# Altium PCB PCB1.PcbDoc
Units mm, origin at the board's own origin, x right, y up, seen from the top; angles counter-clockwise.
Board outline 116.59 x 62.99 mm, 2 copper layers (Top Layer, Bottom Layer); 34 components, 18 nets, 83 pads, 0 vias.
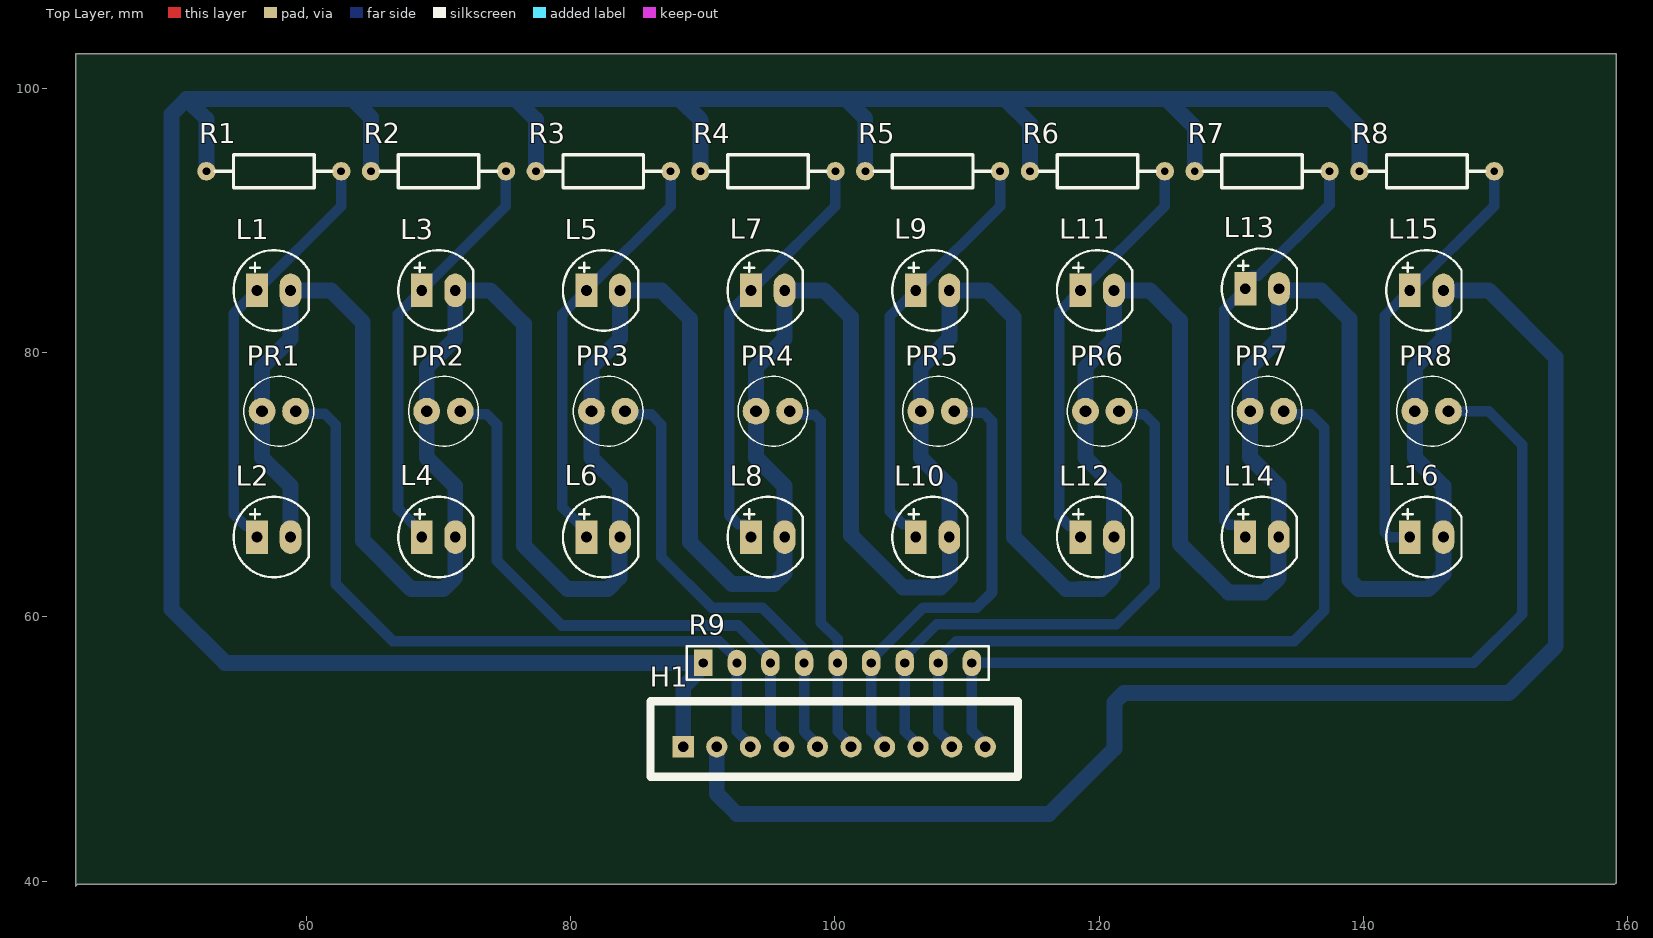
[diagram p0: Top Layer view]
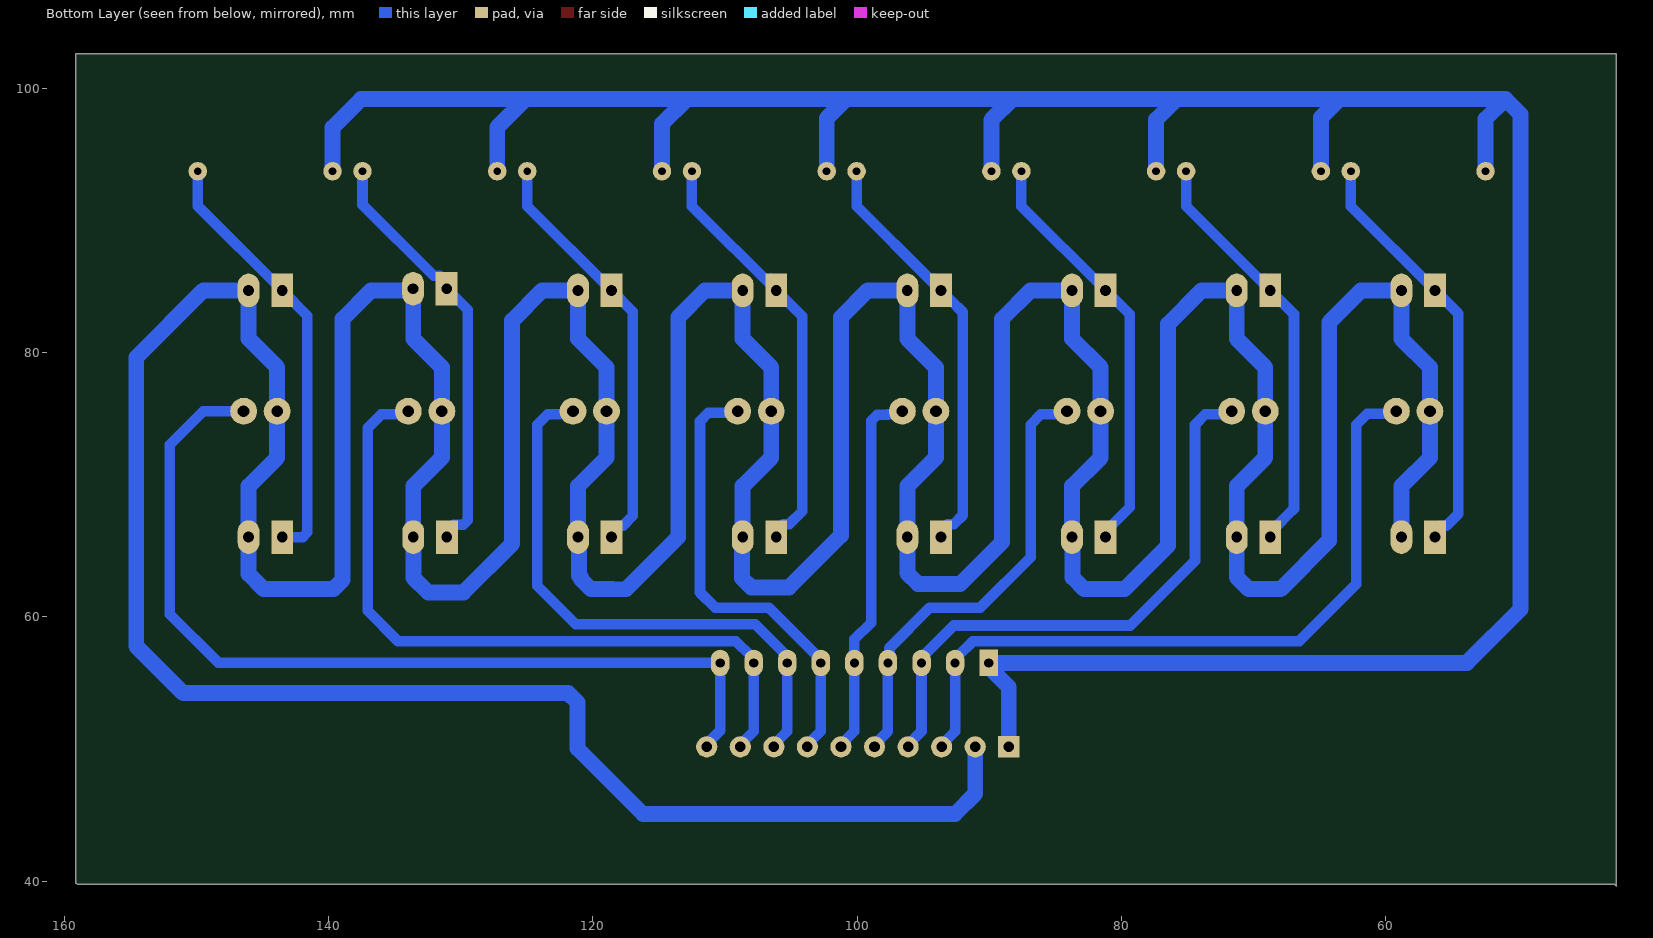
[diagram p1: Bottom Layer view, seen from below]
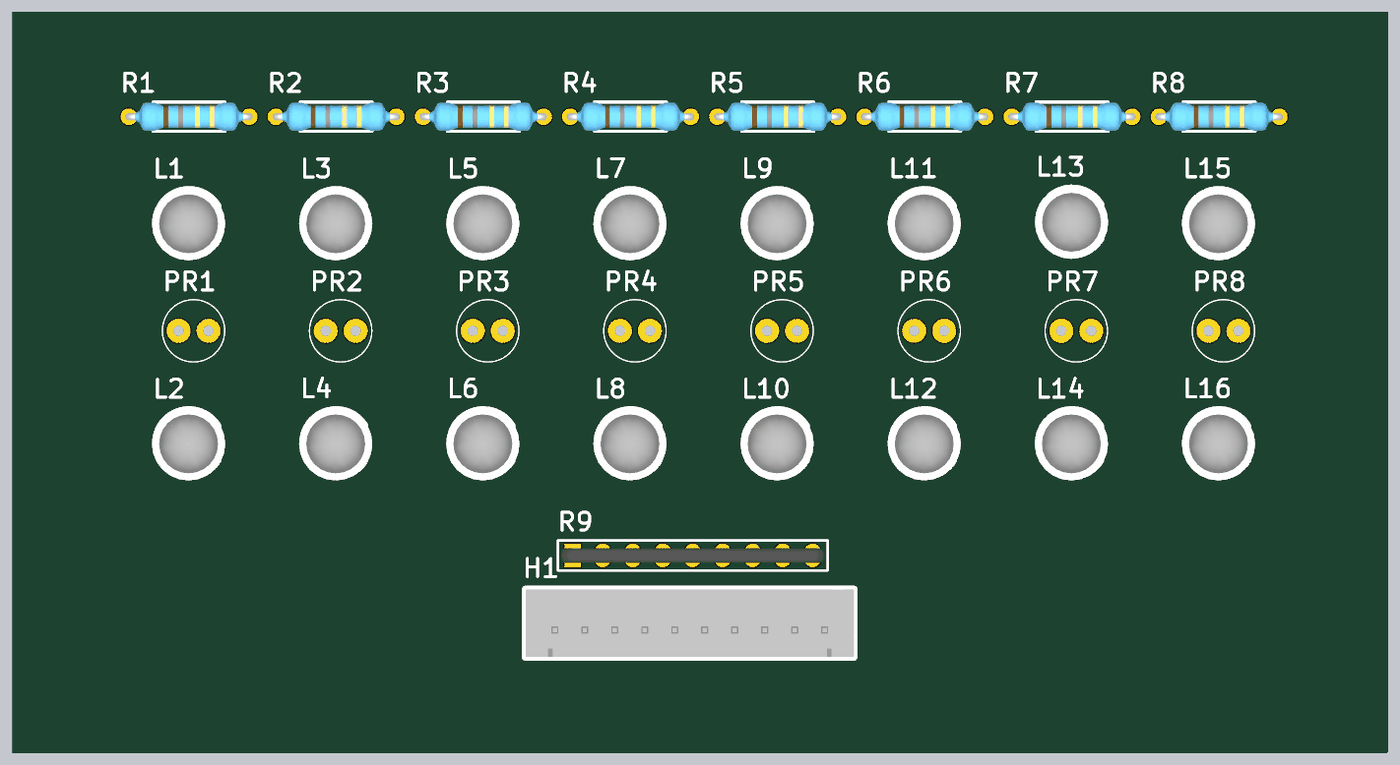
[diagram p2: 3D render of the assembled board from above, using the file's embedded part models]

## Layer stack, top to bottom
Top Solder: solder mask 0.0102, Solder Resist, Dk 3.5
Top Layer: signal copper 0.0356
Dielectric 1: dielectric 0.32, FR-4, Dk 4.8
Bottom Layer: signal copper 0.0356
Bottom Solder: solder mask 0.0102, Solder Resist, Dk 3.5

## Board outline
42.545,39.624 42.672,39.751 159.004,39.751 159.131,39.878 159.131,102.616 42.545,102.616

## Design rules (kind name [scope] priority, off if disabled: settings)
Clearance [All] p1: gap=0.254 ignorepadtopadclearanceinfootprint=FALSE except(0: Arc-Hole Track-Hole SMDPad-Hole THPad-Hole Via-Hole Fill-Hole Poly-Hole Region-Hole Text-Hole)
PolygonConnect [All] p1: connectstyle=Relief reliefconductorwidth=0.254 reliefentries=4 polygonreliefangle="90 Angle" airgapwidth=0.254
RoutingCorners [All] p1: cornerstyle=Round minsetback=2.54 maxsetback=2.54
RoutingVias [All] p1: holewidth=0.711 width=1.27 viastyle="Through Hole" minholewidth=0.711 minwidth=1.27 maxholewidth=0.711 maxwidth=1.27
SolderMaskExpansion [All] p1: expansion=0.102 istentingtop=FALSE
Width gnd [InNet('GND')] p1: maxlimit=1.2 minlimit=0.8 preferedwidth=1
Width 5V [InNet('+5')] p2: maxlimit=1.2 minlimit=0.8 preferedwidth=1
Width width1 [All] p3: maxlimit=0.8 minlimit=0.4 preferedwidth=0.8
29 further rules are at their usual default settings.

## Components (designator, comment, footprint, x,y, rotation, side; value= is the part's Value field where it differs from the comment)
H1 "Header 10P 2.54 Duc Thang" XH2.54M-10 88.519,50.165 r0 top
L1 "LED" LED-5MM-WHITE 57.531,84.709 r0 top
L2 "LED" LED-5MM-WHITE 57.531,66.04 r0 top
L3 "LED" LED-5MM-WHITE 69.996,84.709 r0 top
L4 "LED" LED-5MM-WHITE 69.996,66.04 r0 top
L5 "LED" LED-5MM-WHITE 82.46,84.709 r0 top
L6 "LED" LED-5MM-WHITE 82.46,66.04 r0 top
L7 "LED" LED-5MM-WHITE 94.925,84.709 r0 top
L8 "LED" LED-5MM-WHITE 94.925,66.04 r0 top
L9 "LED" LED-5MM-WHITE 107.389,84.709 r0 top
L10 "LED" LED-5MM-WHITE 107.389,66.04 r0 top
L11 "LED" LED-5MM-WHITE 119.854,84.709 r0 top
L12 "LED" LED-5MM-WHITE 119.854,66.04 r0 top
L13 "LED" LED-5MM-WHITE 132.334,84.836 r0 top
L14 "LED" LED-5MM-WHITE 132.318,66.04 r0 top
L15 "LED" LED-5MM-WHITE 144.783,84.709 r0 top
L16 "LED" LED-5MM-WHITE 144.783,66.04 r0 top
PR1 "Quang Tro" "Quang Tro" 57.912,75.565 r0 top
PR2 "Quang Tro" "Quang Tro" 70.374,75.565 r0 top
PR3 "Quang Tro" "Quang Tro" 82.838,75.565 r0 top
PR4 "Quang Tro" "Quang Tro" 95.303,75.565 r0 top
PR5 "Quang Tro" "Quang Tro" 107.767,75.565 r0 top
PR6 "Quang Tro" "Quang Tro" 120.232,75.565 r0 top
PR7 "Quang Tro" "Quang Tro" 132.696,75.565 r0 top
PR8 "Quang Tro" "Quang Tro" 145.161,75.565 r0 top
R1 "220R" "tro vach 1/4w" 57.531,93.726 r180 top
R2 "220R" "tro vach 1/4w" 69.998,93.726 r180 top
R3 "220R" "tro vach 1/4w" 82.465,93.726 r180 top
R4 "220R" "tro vach 1/4w" 94.932,93.726 r180 top
R5 "220R" "tro vach 1/4w" 107.399,93.726 r180 top
R6 "220R" "tro vach 1/4w" 119.866,93.726 r180 top
R7 "220R" "tro vach 1/4w" 132.333,93.726 r180 top
R8 "220R" "tro vach 1/4w" 144.8,93.726 r180 top
R9 "10k" "tro bang a9" 100.203,56.642 r0 top

## Footprints (in the part's own frame and the unit in brackets; to place one, negate y for a bottom-side part, rotate by r counter-clockwise, add the part's x,y. Pads: shape width x height; smd on the part's side, far side on the other; paste and mask are expansions set on the pad)
LED-5MM-WHITE [mil] "LED 2 PIN, 5 ly , Only colour, pin to pin 110mil"
  rect 65x100 hole 32: 1(-50,0)
  oval 65x100 hole 32: 2(50,0)
  silkscreen extent -120,-120 104,120, body extent -124,-125 121,120, height 340
"Quang Tro" [mil]
  round 80 hole 35: 1(-50,0) 2(50,0)
  silkscreen extent -104,-104 104,104
"tro bang a9" [mm]
  rect 1.4x2 hole 0.7: 1(-10.16,-0.127)
  oval 1.4x2 hole 0.7: 2(-7.62,-0.127) 3(-5.08,-0.127) 4(-2.54,-0.127) 5(0,-0.127) 6(2.54,-0.127) 7(5.08,-0.127) 8(7.62,-0.127) 9(10.16,-0.127)
  silkscreen extent -11.43,-1.4 11.43,1.14, body extent -11.25,-0.76 11.25,0.49, height 5.57
"tro vach 1/4w" [mm]
  round 1.4 hole 0.6: 1(-5.1,0) 2(5.1,0)
  silkscreen extent -4.39,-1.25 4.42,1.25, body extent -5.38,-1.2 5.38,1.2, height 2.41
XH2.54M-10 [mm]
  rect 1.6x1.6 hole 0.8: 1(0,0)
  round 1.6 hole 0.8: 2(2.54,0) 3(5.08,0) 4(7.62,0) 5(10.16,0) 6(12.7,0) 7(15.24,0) 8(17.78,0) 9(20.32,0) 10(22.86,0)
  silkscreen extent -2.48,-2.26 25.34,3.46, body extent -2.48,-2.26 25.34,3.48, height 6.91

## Part data
H1: "Cắm", Chung_Loai=Cắm, Don_Vi=Con, Ma_Hang=MH001286, Ten_Linh_Kien="Header 10P XH2.54-10P Đực Thẳng"
L1 L2 L3 L4 L5 L6 L7 L8 L9 L10 L11 L12 L13 L14 L15 L16: library part "LED 5mm Trang", "Cắm", Chung_Loai=Cắm, Don_Vi=Con, Ma_Hang=MH008983, Ten_Linh_Kien="Led 5MM Trắng Đục (1000c)"
PR1 PR2 PR3 PR4 PR5 PR6 PR7 PR8: "Photoresistor", Creator="Bien Nguyen"
R1 R2 R3 R4 R5 R6 R7 R8: library part "Tro Vach 1/4W 5% 220R", "Cắm", Chung_Loai=Cắm, Don_Vi=Con, Ma_Hang=MH007300, So_Chan=2, Ten_Linh_Kien="Trở Vạch 1/4w 5% 220R"
R9: library part "Tro Bang A9 100k", "Cắm", Chung_Loai=Cắm, Don_Vi=Con, Ma_Hang=MH001443, So_Chan=9, Ten_Linh_Kien="Trở Băng A09-104 100k 1/8w 5%"

## Nets (pads, with @x,y where several pads share a name; then routed paths per layer and width w, separated by ;. In a path a pad name is that pad's centre, name@x,y a point inside that pad or via, vN(x,y) a via of type N, cw(c..) or ccw(c..) an arc to the next point about the centre after c; other vN are vias at no path point)
+5: H1.1 R1.2 R2.2 R3.2 R4.2 R5.2 R6.2 R7.2 R8.2 R9.1 | length 224
  Bottom Layer w1.2: R1.2 52.431,97.683 50.927,99.187 ; R2.2 64.898,97.789 63.5,99.187 ; R3.2 77.365,97.641 75.819,99.187 ; H1.1 88.519,54.691 90.043,56.215 R9.1 53.848,56.515 49.784,60.579 49.784,98.044 50.927,99.187 ; R4.2 89.832,97.62 88.265,99.187 ; R5.2 102.299,97.726 100.838,99.187 ; R6.2 114.766,97.324 112.903,99.187 ; R7.2 127.233,97.049 125.095,99.187 ; R8.2 139.7,97.028 137.541,99.187 125.095,99.187 ; 50.927,99.187 63.5,99.187 ; 63.5,99.187 75.819,99.187 ; 75.819,99.187 88.265,99.187 ; 88.265,99.187 100.838,99.187 ; 100.838,99.187 112.903,99.187 ; 112.903,99.187 125.095,99.187
GND: H1.2 L1.2 L2.2 L3.2 L4.2 L5.2 L6.2 L7.2 L8.2 L9.2 L10.2 L11.2 L12.2 L13.2 L14.2 L15.2 L16.2 PR1.1 PR2.1 PR3.1 PR4.1 PR5.1 PR6.1 PR7.1 PR8.1 | length 517.6
  Bottom Layer w1.2: L2.2 58.801,69.892 56.639,72.054 56.639,75.565 56.639,78.885 58.801,81.047 L1.2 61.849,84.709 64.262,82.296 64.262,65.786 67.945,62.103 70.358,62.103 71.266,63.011 L4.2 71.266,69.892 69.104,72.054 PR2.1 69.104,78.885 71.266,81.047 L3.2 73.914,84.709 76.454,82.169 76.454,65.405 79.756,62.103 82.804,62.103 83.693,62.992 83.693,66.003 L6.2 83.73,69.892 81.568,72.054 PR3.1 81.568,78.885 83.73,81.047 83.73,84.264 L5.2 86.868,84.709 89.027,82.55 89.027,65.659 92.202,62.484 95.377,62.484 96.195,63.302 L8.2 96.195,69.892 94.033,72.054 PR4.1 94.033,78.885 96.195,81.047 96.195,84.264 L7.2 99.187,84.709 101.219,82.677 101.219,66.167 105.156,62.23 108.009,62.23 108.712,62.933 108.712,65.987 L10.2 108.659,69.892 106.497,72.054 PR5.1 106.497,78.885 108.659,81.047 108.659,84.264 L9.2 111.506,84.709 113.538,82.677 113.538,66.04 117.486,62.092 118.48,62.092 118.491,62.103 120.142,62.103 120.904,62.865 120.904,62.992 121.038,63.126 121.038,65.954 L12.2 121.124,69.892 118.962,72.054 PR6.1 118.962,78.885 121.124,81.047 121.124,84.264 L11.2 123.825,84.709 126.111,82.423 126.111,65.532 129.794,61.849 132.461,61.849 133.582,62.97 133.582,66.034 L14.2 133.588,69.892 131.426,72.054 PR7.1 131.426,78.885 133.588,81.047 133.588,84.264 133.588,84.709 136.779,84.709 138.938,82.55 138.938,62.806 139.641,62.103 144.907,62.103 146.05,63.246 146.05,66.037 L16.2 146.053,69.892 143.891,72.054 PR8.1 143.891,78.885 146.053,81.047 L15.2 149.479,84.709 154.559,79.629 154.559,57.785 151.003,54.229 121.861,54.229 121.158,53.526 121.158,50.038 116.205,45.085 92.583,45.085 91.059,46.609 H1.2
NetH1_3: H1.3 PR1.2 R9.2 | length 55.3
  Bottom Layer w0.5: H1.3 H1.3@93.599,50.325
  Bottom Layer w0.8: PR1.2@59.179,75.565 59.36,75.384 61.395,75.384 62.23,74.549 62.23,62.484 66.548,58.166 89.069,58.166 89.072,58.169 91.229,58.169 92.387,57.011 92.387,56.711 R9.2 92.583,51.341 H1.3@93.599,50.325
NetH1_4: H1.4 PR2.2 R9.3 | length 44.4
  Bottom Layer w0.5: H1.4 H1.4@96.139,50.325
  Bottom Layer w0.8: PR2.2 71.879,75.329 73.642,75.329 74.422,74.549 74.422,64.262 79.337,59.347 92.672,59.347 95.123,56.896 R9.3 95.123,51.341 H1.4@96.139,50.325
NetH1_5: H1.5 PR3.2 R9.4 | length 34.7
  Bottom Layer w0.5: H1.5 H1.5@98.679,50.325
  Bottom Layer w0.8: PR3.2 84.344,75.329 86.088,75.329 86.868,74.549 86.868,64.516 90.678,60.706 94.488,60.706 97.548,57.646 97.548,56.63 R9.4 97.663,51.341 H1.5@98.679,50.325
NetH1_6: H1.6 PR4.2 R9.5 | length 28.3
  Bottom Layer w0.5: H1.6 H1.6@101.219,50.325
  Bottom Layer w0.8: PR4.2 96.808,75.329 97.639,75.329 97.657,75.311 98.464,75.311 98.933,74.842 98.933,59.563 100.203,58.293 R9.5 100.203,51.341 H1.6@101.219,50.325
NetH1_7: H1.7 PR5.2 R9.6 | length 34.4
  Bottom Layer w0.5: H1.7 H1.7@103.759,50.325
  Bottom Layer w0.8: H1.7@103.759,50.325 102.743,51.341 102.743,56.769 106.68,60.706 110.744,60.706 111.887,61.849 111.887,74.803 111.253,75.437 109.166,75.437 PR5.2
NetH1_8: H1.8 PR6.2 R9.7 | length 43.7
  Bottom Layer w0.5: H1.8 H1.8@106.299,50.325
  Bottom Layer w0.8: H1.8@106.299,50.325 105.283,51.341 105.283,56.977 105.583,57.277 105.583,57.323 107.696,59.436 121.285,59.436 124.206,62.357 124.206,74.549 123.426,75.329 121.738,75.329 PR6.2
NetH1_9: H1.9 PR7.2 R9.8 | length 55.2
  Bottom Layer w0.5: H1.9 H1.9@108.839,50.325
  Bottom Layer w0.8: H1.9@108.839,50.325 107.823,51.341 R9.8 108.019,56.711 108.019,57.011 109.177,58.169 110.924,58.169 110.927,58.166 134.747,58.166 137.033,60.452 137.033,74.295 135.999,75.329 134.202,75.329 PR7.2
NetH1_10: H1.10 PR8.2 R9.9 | length 69.4
  Bottom Layer w0.8: H1.10 111.379,50.381 110.363,51.397 R9.9 148.336,56.515 152.019,60.198 152.019,73.025 149.479,75.565 PR8.2
NetL1_1: L1.1 L2.1 R1.1 | length 34.2
  Bottom Layer w0.8: L1.1@55.836,83.839 56.261,84.264 L1.1 ; L2.1 56.261,66.484 55.836,66.91 55.391,66.91 54.483,67.818 54.483,82.931 L1.1 ; L1.1@56.686,85.579 56.261,85.153 L1.1 ; R1.1 62.631,91.079 L1.1
NetL3_1: L3.1 L4.1 R2.1 | length 34
  Bottom Layer w0.5: 67.361,67.767 67.443,67.767
  Bottom Layer w0.8: L3.1@68.3,83.839 68.726,84.264 L3.1 ; L4.1 68.726,66.484 68.3,66.91 68.218,66.91 67.361,67.767 66.929,68.199 66.929,82.912 L3.1 ; L3.1@69.151,85.579 68.726,85.153 68.726,84.931 L3.1 ; R2.1 75.098,91.081 L3.1
NetL5_1: L5.1 L6.1 R3.1 | length 34.2
  Bottom Layer w0.5: L6.1 L6.1@81.19,66.484
  Bottom Layer w0.6: L5.1@80.665,83.739 81.19,84.264 L5.1 81.19,85.153 L5.1@81.716,85.679
  Bottom Layer w0.8: L6.1@81.19,66.484 79.375,68.3 79.375,82.894 L5.1 87.565,91.084 R3.1
NetL7_1: L7.1 L8.1 R4.1 | length 34.3
  Bottom Layer w0.6: L8.1@93.129,67.01 93.655,66.484 L8.1 ; L7.1@93.129,83.739 93.655,84.264 L7.1 93.655,85.153 L7.1@94.18,85.679
  Bottom Layer w0.8: L8.1@93.129,67.01 92.685,67.01 91.987,67.708 91.987,83.041 92.907,83.961 93.432,84.487 L7.1 93.877,84.931 94.402,85.457 100.032,91.086 R4.1
NetL9_1: L9.1 L10.1 R5.1 | length 34.5
  Bottom Layer w0.6: L10.1@105.594,67.01 106.119,66.484 L10.1 ; L9.1@105.594,83.739 106.119,84.264 L9.1
  Bottom Layer w0.8: L10.1@105.594,67.01 105.149,67.01 104.151,68.008 104.151,82.74 L9.1 ; L9.1@106.545,85.579 106.119,85.153 L9.1 ; R5.1 112.499,91.089 L9.1
NetL11_1: L11.1 L12.1 R6.1 | length 33
  Bottom Layer w0.8: L11.1@118.158,83.839 118.584,84.264 L11.1@118.584,84.703 ; L12.1 118.584,66.484 118.158,66.91 117.714,66.91 116.967,67.657 116.967,83.087 L11.1@118.584,84.703 ; L11.1@118.587,84.706 L11.1@118.584,84.703 ; R6.1 124.966,91.091 L11.1 L11.1@118.584,84.703
NetL13_1: L13.1 L14.1 R7.1 | length 32.3
  Bottom Layer w0.6: L14.1@130.523,66.972 131.048,66.447 L14.1 ; L13.1 131.064,85.281 L13.1@131.59,85.806
  Bottom Layer w0.8: L14.1@130.523,66.972 129.812,66.972 129.461,67.324 129.461,83.233 L13.1@131.024,84.796 ; L13.1@131.59,85.806 132.034,85.806 137.433,91.205 R7.1
NetL15_1: L15.1 L16.1 R8.1 | length 35.2
  Bottom Layer w0.6: L15.1@142.987,83.739 143.513,84.264 L15.1 143.513,85.153 L15.1@144.038,85.679
  Bottom Layer w0.8: L16.1 141.956,66.04 141.605,66.391 141.605,82.801 L15.1 149.9,91.096 R8.1

## Silkscreen, mask and mechanical layers (free items; w line width, h text height)
Mechanical 1:
  lines w1.27: 42.418,39.751 42.418,102.616 159.131,102.616 159.131,39.878 159.004,39.751 42.418,39.751